# Altium PCB ina_extension_jack_motor_pcb.PcbDoc
Units mil, origin at the board's own origin, x right, y up, seen from the top; angles counter-clockwise.
Board outline 3543.31 x 295.28 mil, 2 copper layers (Top Layer, Bottom Layer); 67 components, 38 nets, 115 pads, 17 vias.
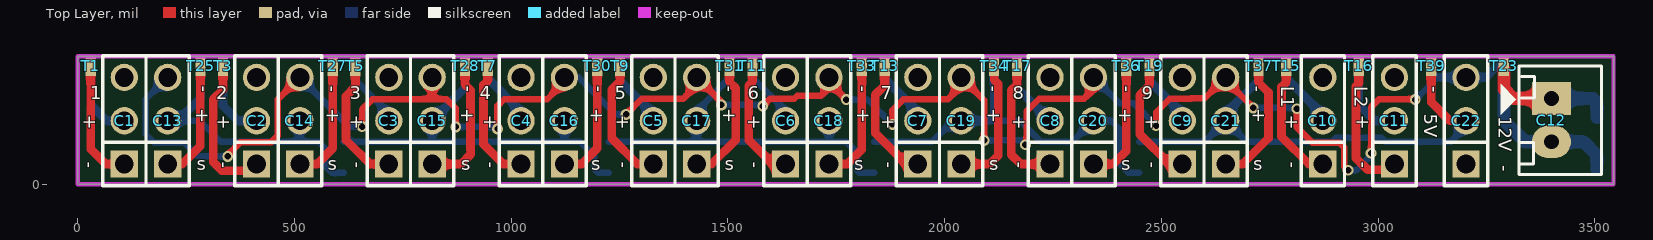
[diagram p0: Top Layer view]
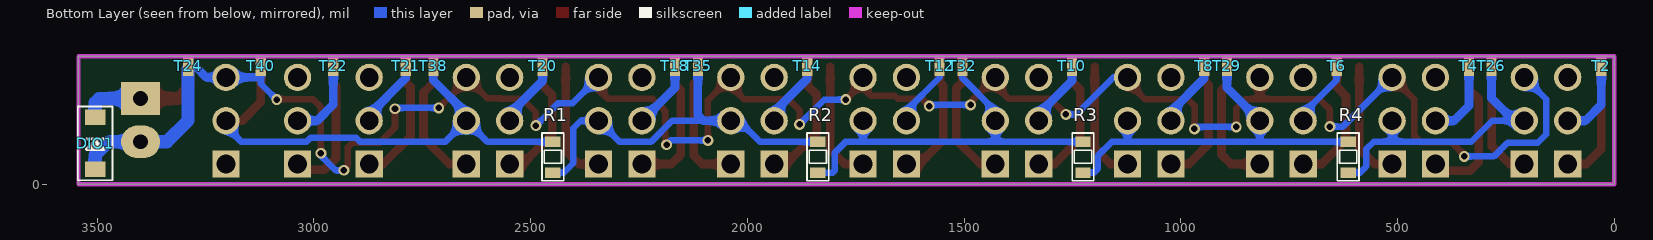
[diagram p1: Bottom Layer view, seen from below]
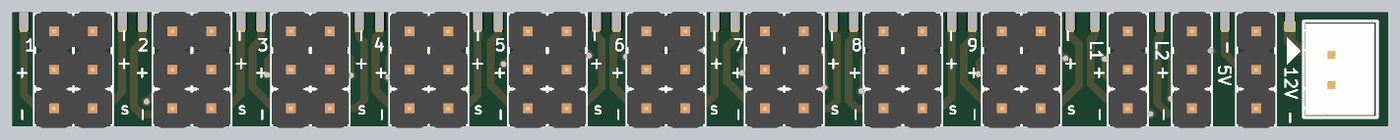
[diagram p2: 3D render of the assembled board from above, using the file's embedded part models]
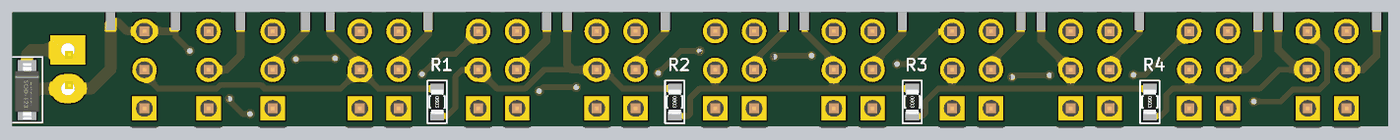
[diagram p3: 3D render of the assembled board from below, using the file's embedded part models]

## Layer stack, top to bottom
Top Solder: solder mask 0.4, Solder Resist, Dk 3.5
Top Layer: signal copper 1.4
Dielectric 1: dielectric 12.6, FR-4, Dk 4.8
Bottom Layer: signal copper 1.4
Bottom Solder: solder mask 0.4, Solder Resist, Dk 3.5

## Board outline
0,0 3543.31,0 3543.31,295.28 0,295.28

## Design rules (kind name [scope] priority, off if disabled: settings)
Clearance [All] p1: gap=10
PolygonConnect [All] p1: connectstyle=Relief reliefconductorwidth=10 reliefentries=4 polygonreliefangle="90 Angle" airgapwidth=10
RoomDefinition ina_extension_jack_motor_schematic [InComponentClass('ina_extension_jack_motor_schematic')] p1: confinementstyle=ConfineIn formatcopy=TRUE lockcomponents=FALSE outline 3748,11 4118,11 4118,231 3748,231
RoutingVias [All] p1: holewidth=15 width=25 viastyle="Through Hole" minholewidth=15 minwidth=25 maxholewidth=28 maxwidth=50
SolderMaskExpansion [All] p1: expansion=4
Width [All] p1: maxlimit=30 minlimit=10 preferedwidth=10
30 further rules are at their usual default settings.

## Components (designator, comment, footprint, x,y, rotation, side; value= is the part's Value field where it differs from the comment)
C1 "JP3" JP3-D1T 107.48,46.34 r90 top
C2 "JP3" JP3-D1T 412.6,46.34 r90 top
C3 "JP3" JP3-D1T 717.72,46.34 r90 top
C4 "JP3" JP3-D1T 1022.83,46.34 r90 top
C5 "JP3" JP3-D1T 1327.95,46.34 r90 top
C6 "JP3" JP3-D1T 1633.07,46.34 r90 top
C7 "JP3" JP3-D1T 1938.19,46.34 r90 top
C8 "JP3" JP3-D1T 2243.31,46.34 r90 top
C9 "JP3" JP3-D1T 2548.43,46.34 r90 top
C10 "JP3" JP3-D1T 2872.55,46.34 r90 top
C11 "JP3" JP3-D1T 3037.77,46.34 r90 top
C12 "Header2" Header2 3400,197.64 r270 top
C13 "JP3" JP3-D1T 207.48,46.34 r90 top
C14 "JP3" JP3-D1T 512.6,46.34 r90 top
C15 "JP3" JP3-D1T 817.72,46.34 r90 top
C16 "JP3" JP3-D1T 1122.83,46.34 r90 top
C17 "JP3" JP3-D1T 1427.95,46.34 r90 top
C18 "JP3" JP3-D1T 1733.07,46.34 r90 top
C19 "JP3" JP3-D1T 2038.19,46.34 r90 top
C20 "JP3" JP3-D1T 2343.31,46.34 r90 top
C21 "JP3" JP3-D1T 2648.43,46.34 r90 top
C22 "JP3" JP3-D1T 3203,46.34 r90 top
DIO1 "Diode SMD" DIO-SMD-123 3505,94 r270 bottom
R1 "0R" RES-SMD-0603 2449,63.01 r270 bottom
R2 "0R" RES-SMD-0603 1837.33,63 r270 bottom
R3 "0R" RES-SMD-0603 1225.67,63 r270 bottom
R4 "0R" RES-SMD-0603 614,63 r270 bottom
T1 "Pad" PCBComponent_1#1 29.92,272.65 r0 top locked
T2 "Pad" PCBComponent_1#2 29.92,272.65 r180 top
T3 "Pad" PCBComponent_1#1 335.24,272.65 r180 top
T4 "Pad" PCBComponent_1#2 335.24,272.65 r180 top
T5 "Pad" PCBComponent_1#1 640.55,272.65 r0 top
T6 "Pad" PCBComponent_1#2 640.55,272.65 r0 top
T7 "Pad" PCBComponent_1#1 945.87,272.65 r0 top
T8 "Pad" PCBComponent_1#2 945.87,272.65 r0 top
T9 "Pad" PCBComponent_1#1 1251.18,272.65 r0 top
T10 "Pad" PCBComponent_1#2 1251.18,272.65 r180 top
T11 "Pad" PCBComponent_1#1 1556.5,272.65 r0 top
T12 "Pad" PCBComponent_1#2 1556.5,272.65 r180 top
T13 "Pad" PCBComponent_1#1 1861.81,272.65 r180 top
T14 "Pad" PCBComponent_1#2 1861.81,272.65 r180 top
T15 "Pad" PCBComponent_1#1 2788,272.65 r180 top
T16 "Pad" PCBComponent_1#1 2955.33,272.65 r180 top
T17 "Pad" PCBComponent_1#1 2167.13,272.65 r180 top
T18 "Pad" PCBComponent_1#2 2167.13,272.65 r180 top
T19 "Pad" PCBComponent_1#1 2472.44,272.65 r180 top locked
T20 "Pad" PCBComponent_1#2 2472.44,272.65 r180 top
T21 "Pad" PCBComponent_1#1 2788,272.65 r0 bottom
T22 "Pad" PCBComponent_1#1 2955.33,272.65 r0 bottom
T23 "Pad" PCBComponent_1#1 3290,272.65 r180 top
T24 "Pad" PCBComponent_1#1 3290,272.65 r0 bottom
T25 "Pad" PCBComponent_1#1 283.46,272.65 r180 top locked
T26 "Pad" PCBComponent_1#1 283.46,272.65 r0 bottom
T27 "Pad" PCBComponent_1#1 588.58,272.65 r180 top
T28 "Pad" PCBComponent_1#1 893.7,272.65 r180 top
T29 "Pad" PCBComponent_1#1 893.7,272.65 r0 bottom
T30 "Pad" PCBComponent_1#1 1198.82,272.65 r180 top
T31 "Pad" PCBComponent_1#1 1503.94,272.65 r180 top
T32 "Pad" PCBComponent_1#1 1503.94,272.65 r0 bottom
T33 "Pad" PCBComponent_1#1 1809.06,272.65 r180 top
T34 "Pad" PCBComponent_1#1 2114.17,272.65 r180 top
T35 "Pad" PCBComponent_1#1 2114.17,272.65 r0 bottom
T36 "Pad" PCBComponent_1#1 2419.29,272.65 r180 top
T37 "Pad" PCBComponent_1#1 2724.41,272.65 r180 top locked
T38 "Pad" PCBComponent_1#1 2724.41,272.65 r0 bottom
T39 "Pad" PCBComponent_1#1 3122.67,272.65 r180 top
T40 "Pad" PCBComponent_1#1 3122.67,272.65 r0 bottom

## Footprints (in the part's own frame and the unit in brackets; to place one, negate y for a bottom-side part, rotate by r counter-clockwise, add the part's x,y. Pads: shape width x height; smd on the part's side, far side on the other; paste and mask are expansions set on the pad)
DIO-SMD-123 [mm]
  rect 0.9x1.2 smd: 1(1.524,0) 2(-1.524,0)
  silkscreen extent -2.16,-1.02 2.16,1.02, body extent -1.76,-0.8 1.94,0.8, height 1.25
Header2 [mil] "CON2"
  rect 75x90 hole 34: 1(0,0)
  oval 75x90 hole 34: 2(100,0)
  silkscreen extent -75,-118 175,115, body extent -68,-70 168,107, height 236
JP3-D1T [mm] "3 pins, 1 row, straight, gold plating"
  rect 1.6x1.6 hole 1.1: 1(0,0)
  round 1.6 hole 1.1: 2(2.54,0) 3(5.08,0)
  silkscreen extent -1.27,-1.27 6.35,1.27, body extent -1.27,-1.27 6.35,1.27, height 8.54
PCBComponent_1#1 [mm]
  rect 0.6x1.2 smd: 0(0,0)
PCBComponent_1#2 [mm]
  rect 0.6x1.2 smd far side: 0(0,0)
RES-SMD-0603 [mm]
  rect 0.6x0.9 smd: 1(-0.889,0) 2(0.927,0)
  silkscreen extent -1.4,-0.64 1.4,0.64, body extent -0.8,-0.4 0.8,0.4, height 0.43

## Part data
C1 C2 C3 C4 C5 C6 C7 C8 C9 C10 C11 C13 C14 C15 C16 C17 C18 C19 C20 C21 C22: "WR-PHD 2.54 mm Angled Socket Header"
C12: "Header IDC, 2 x 1 Pin Vertical 2.54mm Pitch (Non-Boxed, Male)"
DIO1: "Default Diode"
R1 R2 R3 R4: library part Res-SMD, "Resistor"
T1 T2 T3 T4 T5 T6 T7 T8 T9 T10 T11 T12 T13 T14 T15 T16 T17 T18 T19 T20 T21 T22 T23 T24 T25 T26 T27 T28 T29 T30 T31 T32 T33 T34 T35 T36 T37 T38 T39 T40: library part Component_1, "pad"

## Via types
v1: diameter 25, hole 15, Top Layer to Bottom Layer, tented both sides, 17 vias

## Nets (pads, with @x,y where several pads share a name; then routed paths per layer and width w, separated by ;. In a path a pad name is that pad's centre, name@x,y a point inside that pad or via, vN(x,y) a via of type N, cw(c..) or ccw(c..) an arc to the next point about the centre after c; other vN are vias at no path point)
5V_1: C13.2 C14.2 R4.2 T26.0 | length 677
  Bottom Layer w15: C13.2 231.34,146.34 281.66,146.34 330,98 391.65,98 392.3,97.34 432.89,97.34 433.55,98 511,98 ; C14.2 511,144.74 511,98 ; R4.2 586.49,26.51 572,41 572,81 555,98 511,98
  Bottom Layer w20: C13.2@231.34,146.34 283.46,198.46 T26.0
5V_2: C15.2 C16.2 R3.2 R4.1 T29.0 | length 912.5
  Bottom Layer w15: R4.1 614,97.34 738.01,97.34 738.67,98 817.72,98 ; C15.2 817.72,98 ; C16.2 1122.83,97.51 1123,97.34 ; R3.2 1200.49,26.51 1192,35 1192,64.91 1159.57,97.34 1123,97.34 ; 817.72,98 818.37,97.34 1123,97.34
  Bottom Layer w20: C15.2 893.7,222.32 T29.0@893.7,270.28
5V_3: C17.2 C18.2 R2.2 R3.1 T32.0 | length 921.9
  Bottom Layer w15: R3.1 1225.67,97.34 1427,97.34 ; T32.0 1503.94,244.94 1427.95,168.95 C17.2 1427,145.39 1427,97.34 ; C18.2 1733.07,97.41 1733,97.34 ; R2.2 1803.49,26.51 1798,32 1798,73 1773.66,97.34 1733,97.34 ; 1427,97.34 1733,97.34
5V_4: C19.2 C20.2 R1.2 R2.1 T35.0 | length 899.6
  Bottom Layer w15: R2.1 1837.33,97.34 1970.34,97.34 2019.34,146.34 C19.2 ; 2101.34,146.34 2173.66,146.34 2222.66,97.34 2294.34,97.34 C20.2 ; C20.2 2384.66,146.34 2402,129 2402,48 2423.48,26.52 R1.2
  Bottom Layer w20: C19.2 2101.34,146.34 2114.17,159.17 T35.0@2114.17,270.28
5V_5: C21.2 C22.2 R1.1 T38.0 T39.0 | length 1165.9
  Top Layer w20: T39.0@3122.67,270.28 3122.67,189.33 3165.66,146.34 C22.2
  Bottom Layer w15: R1.1 2449,97.34 2599.43,97.34 C21.2 2697.42,97.34 2892.84,97.34 2902.5,107 3007.82,107 3017.48,97.34 3167.34,97.34 3203,133 C22.2
  Bottom Layer w20: C21.2 2648.43,163.43 2724.41,239.41 T38.0@2724.41,270.28
GND: C12.2 C13.3 C14.3 C15.3 C16.3 C17.3 C18.3 C19.3 C20.3 C21.3 C22.3 DIO1.1 T24.0 T40.0 | length 5075.3
  Top Layer w15: v1(346,64) 346,67.48 375.52,97 447,97 462,112 462,195.74 C14.3 ; v1(656,133) 656,172 680,196 817.72,196 ; C15.3 817.72,196 ; v1(872,132) 872,175 851,196 817.72,196 ; v1(968.5,127.34) 968.34,127.34 968.34,180.34 984,196 1083,196 1122.83,235.83 C16.3 ; v1(1265,161) 1301.34,197.34 1397.34,197.34 1427.95,227.95 C17.3 1485,189.29 v1(1485,183) ; v1(1580.5,180.07) 1580.5,180.5 1597.34,197.34 1653.37,197.34 1660.02,204 1715,204 1733.07,222.07 C18.3@1733.07,234.93 ; C18.3 C18.3@1733.07,234.93 ; v1(1773,195) C18.3@1733.07,234.93 ; v1(1879.77,137.77) 1879.77,170.77 1904.33,195.33 2007.33,195.33 2038.19,226.19 C19.3 2091,193.53 v1(2091,101) ; v1(2186.5,91.07) 2189,88.57 2189,168 2218.34,197.34 2322.34,197.34 2343.31,218.31 C20.3 ; v1(2488,135) 2488,166 2519.34,197.34 2568.72,197.34 2569.38,198 2600.09,198 C21.3 2648.43,239.57 v1(2712,176) ; v1(2813,174) 2813,131 2848.67,95.33 2911.29,95.33 2921.54,85.08 2921.54,41.46 v1(2931,32) ; v1(2983.78,71.15) 2983.78,177.78 3002,196 3085,196 v1(3086,195)
  Bottom Layer w15: C13.3 157,195.86 157,115 176.67,95.33 246.23,95.33 277.56,64 v1(346,64) ; C14.3 625.94,133 v1(656,133) ; v1(872,132) 962.34,132 967,127.34 v1(968.5,127.34) ; C16.3 1155.66,246.34 1241,161 v1(1265,161) ; v1(1485,183) 1577.57,183 v1(1580.5,180.07) ; v1(1773,195) 1822.53,195 v1(1879.77,137.77) ; v1(2091,101) 2176.57,101 v1(2186.5,91.07) ; C20.3 2402.65,187 2436,187 v1(2488,135) ; v1(2712,176) 2811,176 v1(2813,174) ; v1(2931,32) 2950,32 2983.78,65.78 v1(2983.78,71.15) ; v1(3086,195) 3122.67,231.67 T40.0@3122.67,253.33
  Bottom Layer w20: T40.0@3122.67,253.33 3129.66,246.34 C22.3 3248.34,246.34 3272.28,270.28 T24.0@3290,270.28
  Bottom Layer w30: T24.0@3290,265.28 3290,147 3339.36,97.64 C12.2 3474.36,97.64 3505,67 DIO1.1
NetC1_1: C1.1 T1.0 | length 283.5
  Top Layer w20: T1.0 29.92,81.08 64.66,46.34 C1.1
NetC1_2: C1.2 T2.0 | length 182.4
  Bottom Layer w20: T2.0 29.92,183.08 66.66,146.34 C1.2
NetC2_1: C2.1 T3.0 | length 342.7
  Top Layer w20: T3.0@335.24,270.28 335.24,218.24 313,196 313,51 333,31 397.26,31 C2.1
NetC2_2: C2.2 T4.0 | length 183.5
  Bottom Layer w20: T4.0 335.24,180.76 369.66,146.34 C2.2
NetC3_1: C3.1 T5.0 | length 299
  Top Layer w20: T5.0@640.55,270.28 640.55,224.55 619,203 619,102 674.66,46.34 C3.1
NetC3_2: C3.2 T6.0 | length 158.3
  Bottom Layer w15: T6.0 640.55,240.45 717.72,163.28 C3.2
NetC4_1: C4.1 T7.0 | length 288.1
  Top Layer w20: T7.0@945.87,270.28 945.87,238.87 936,229 936,92 981.66,46.34 C4.1
NetC4_2: C4.2 T8.0 | length 158.2
  Bottom Layer w20: T8.0 945.87,244.13 1022.83,167.17 C4.2
NetC5_1: C5.1 T9.0 | length 292.9
  Top Layer w20: T9.0@1251.18,270.28 1251.18,237.18 1232,218 1232,106 1291.66,46.34 C5.1
NetC5_2: C5.2 T10.0 | length 155.7
  Bottom Layer w20: T10.0@1251.18,270.28 1251.18,238.82 1327.95,162.05 C5.2
NetC6_1: C6.1 T11.0 | length 279.9
  Top Layer w20: T11.0@1556.5,270.28 1556.5,235.5 1548,227 1548,102 1603.66,46.34 C6.1
NetC6_2: C6.2 T12.0 | length 158
  Bottom Layer w15: T12.0 1556.5,246.5 1633.07,169.93 C6.2
NetC7_1: C7.1 T13.0 | length 289.2
  Top Layer w20: T13.0@1861.81,270.28 1861.81,227.81 1840,206 1840,118 1911.66,46.34 C7.1
NetC7_2: C7.2 T14.0 | length 155.6
  Bottom Layer w20: T14.0@1861.81,270.28 1861.81,243.19 1938.19,166.81 C7.2
NetC8_1: C8.1 T17.0 | length 306
  Top Layer w20: T17.0@2167.13,270.28 2167.13,230.13 2154,217 2154,68 2175.66,46.34 C8.1
NetC8_2: C8.2 T18.0 | length 155.5
  Bottom Layer w20: T18.0@2167.13,270.28 2167.13,222.52 C8.2
NetC9_1: C9.1 T19.0 | length 291.4
  Top Layer w20: T19.0@2472.44,270.28 2472.44,227.44 2450,205 2450,115 2518.66,46.34 C9.1
NetC9_2: C9.2 T20.0 | length 155.4
  Bottom Layer w20: T20.0@2472.44,270.28 2472.44,238.56 2548.43,162.57 C9.2
NetC10_1: C10.1 T15.0 | length 286.4
  Top Layer w20: T15.0@2788,270.28 2788,235 2777.42,224.42 2777.42,109.58 2840.66,46.34 C10.1
NetC10_2: C10.2 T21.0 | length 159
  Bottom Layer w20: T21.0@2788,270.28 2788,245 2872.55,160.45 C10.2
NetC11_1: C11.1 T16.0 | length 318.4
  Top Layer w20: T16.0@2955.33,270.28 2955.33,232.33 2949,226 2949,96.52 2949.04,96.47 2949.04,59.92 2975.96,33 3024.44,33 C11.1
NetC11_2: C11.2 T22.0 | length 184.5
  Bottom Layer w20: T22.0@2955.33,270.28 2955.33,183.67 2992.66,146.34 C11.2
NetC12_1: C12.1 DIO1.2 T23.0 | length 307.5
  Top Layer w30: T23.0@3290,265.28 3290,220 3312.36,197.64 C12.1
  Bottom Layer w30: C12.1 3495.36,197.64 3505,188 DIO1.2
NetC13_1: C13.1 T25.0 | length 275.2
  Top Layer w20: C13.1 241.34,46.34 283,88 283,269.81 T25.0@283.46,270.28
NetC14_1: C14.1 T27.0 | length 278.7
  Top Layer w20: C14.1 552.34,46.34 588.58,82.58 T27.0@588.58,270.28
NetC15_1: C15.1 T28.0 | length 305.5
  Top Layer w20: C15.1 884.34,46.34 907,69 907,78.57 906,79.57 906,217 893.7,229.3 T28.0@893.7,270.28
NetC16_1: C16.1 T30.0 | length 278.6
  Top Layer w20: C16.1 1162.34,46.34 1198.82,82.82 T30.0@1198.82,270.28
NetC17_1: C17.1 T31.0 | length 287.2
  Top Layer w20: C17.1 1462.34,46.34 1518,102 1518,221 1503.94,235.06 T31.0@1503.94,270.28
NetC18_1: C18.1 T33.0 | length 280.2
  Top Layer w20: C18.1 1775.34,46.34 1809.06,80.06 T33.0@1809.06,270.28
NetC19_1: C19.1 T34.0 | length 302.3
  Top Layer w20: C19.1 2104.34,46.34 2124,66 2124,231 2114.17,240.83 T34.0@2114.17,270.28
NetC20_1: C20.1 T36.0 | length 282.4
  Top Layer w20: C20.1 2389.34,46.34 2419.29,76.29 T36.0@2419.29,270.28
NetC21_1: C21.1 T37.0 | length 297.3
  Top Layer w20: C21.1 2687.34,46.34 2747.42,106.42 2747.42,211.58 2724.41,234.59 T37.0@2724.41,270.28
pads on no net: C1.3 C2.3 C3.3 C4.3 C5.3 C6.3 C7.3 C8.3 C9.3 C10.3 C11.3 C22.1

## Keep-outs
Keep-Out Layer:
  the board outline again, w10

## Silkscreen, mask and mechanical layers (free items; w line width, h text height)
Top Overlay:
  text "L1" at 2777,226 h30 r270
  text "L2" at 2946,226 h30 r270
  text "-" at 3117,226 h30 r270
  text "-" at 299.99,212 h30 r90
  text "-" at 597,212 h30 r90
  text "-" at 910,212 h30 r90
  text "-" at 1211,212 h30 r90
  text "-" at 1512,212 h30 r90
  text "-" at 1820,212 h30 r90
  text "-" at 2122,212 h30 r90
  text "-" at 2429,212 h30 r90
  text "-" at 2730,212 h30 r90
  text "1" at 29,196.01 h30
  text "2" at 320,196.01 h30
  text "3" at 628,196.01 h30
  text "4" at 927,196.01 h30
  text "5" at 1239,196.01 h30
  text "6" at 1546,196.01 h30
  text "7" at 1853,196.01 h30
  text "8" at 2157,196.01 h30
  text "9" at 2455,196.01 h30
  text "5V" at 3107,163 h30 r270
  text "+" at 14,159.99 h30 r270
  text "+" at 323,159.99 h30 r270
  text "+" at 630,159.99 h30 r270
  text "+" at 938,159.99 h30 r270
  text "+" at 1244,159.99 h30 r270
  text "+" at 1547,159.99 h30 r270
  text "+" at 1856,159.99 h30 r270
  text "+" at 2158,159.99 h30 r270
  text "+" at 2464,159.99 h30 r270
  text "+" at 2787,159.99 h30 r270
  text "+" at 2951,159.99 h30 r270
  text "12V" at 3278,157 h30 r270
  text "+" at 299.99,140 h30 r90
  text "+" at 601,140 h30 r90
  text "+" at 911,140 h30 r90
  text "+" at 1210,140 h30 r90
  text "+" at 1516,140 h30 r90
  text "+" at 1825,140 h30 r90
  text "+" at 2126,140 h30 r90
  text "+" at 2430,140 h30 r90
  text "+" at 2737,140 h30 r90
  text "-" at 14,52 h30 r270
  text "-" at 324,52 h30 r270
  text "-" at 632,52 h30 r270
  text "-" at 940,52 h30 r270
  text "-" at 1246,52 h30 r270
  text "-" at 1549,52 h30 r270
  text "-" at 1858,52 h30 r270
  text "-" at 2160,52 h30 r270
  text "-" at 2466,52 h30 r270
  text "-" at 2789,52 h30 r270
  text "-" at 2953,52 h30 r270
  text "-" at 3279,44 h30 r270
  text "s" at 275,32.01 h30
  text "s" at 577,32.01 h30
  text "s" at 885,32.01 h30
  text "s" at 1185,32.01 h30
  text "s" at 1493,32.01 h30
  text "s" at 1792,32.01 h30
  text "s" at 2103,32.01 h30
  text "s" at 2407,32.01 h30
  text "s" at 2712,32.01 h30